# Altium PCB PCB1.PcbDoc
Units mil, origin at the board's own origin, x right, y up, seen from the top; angles counter-clockwise.
Board outline 3105 x 1655 mil, 2 copper layers (Top Layer, Bottom Layer); 35 components, 32 nets, 114 pads, 0 vias.
Unrouted connection lines stored in the file: 64.
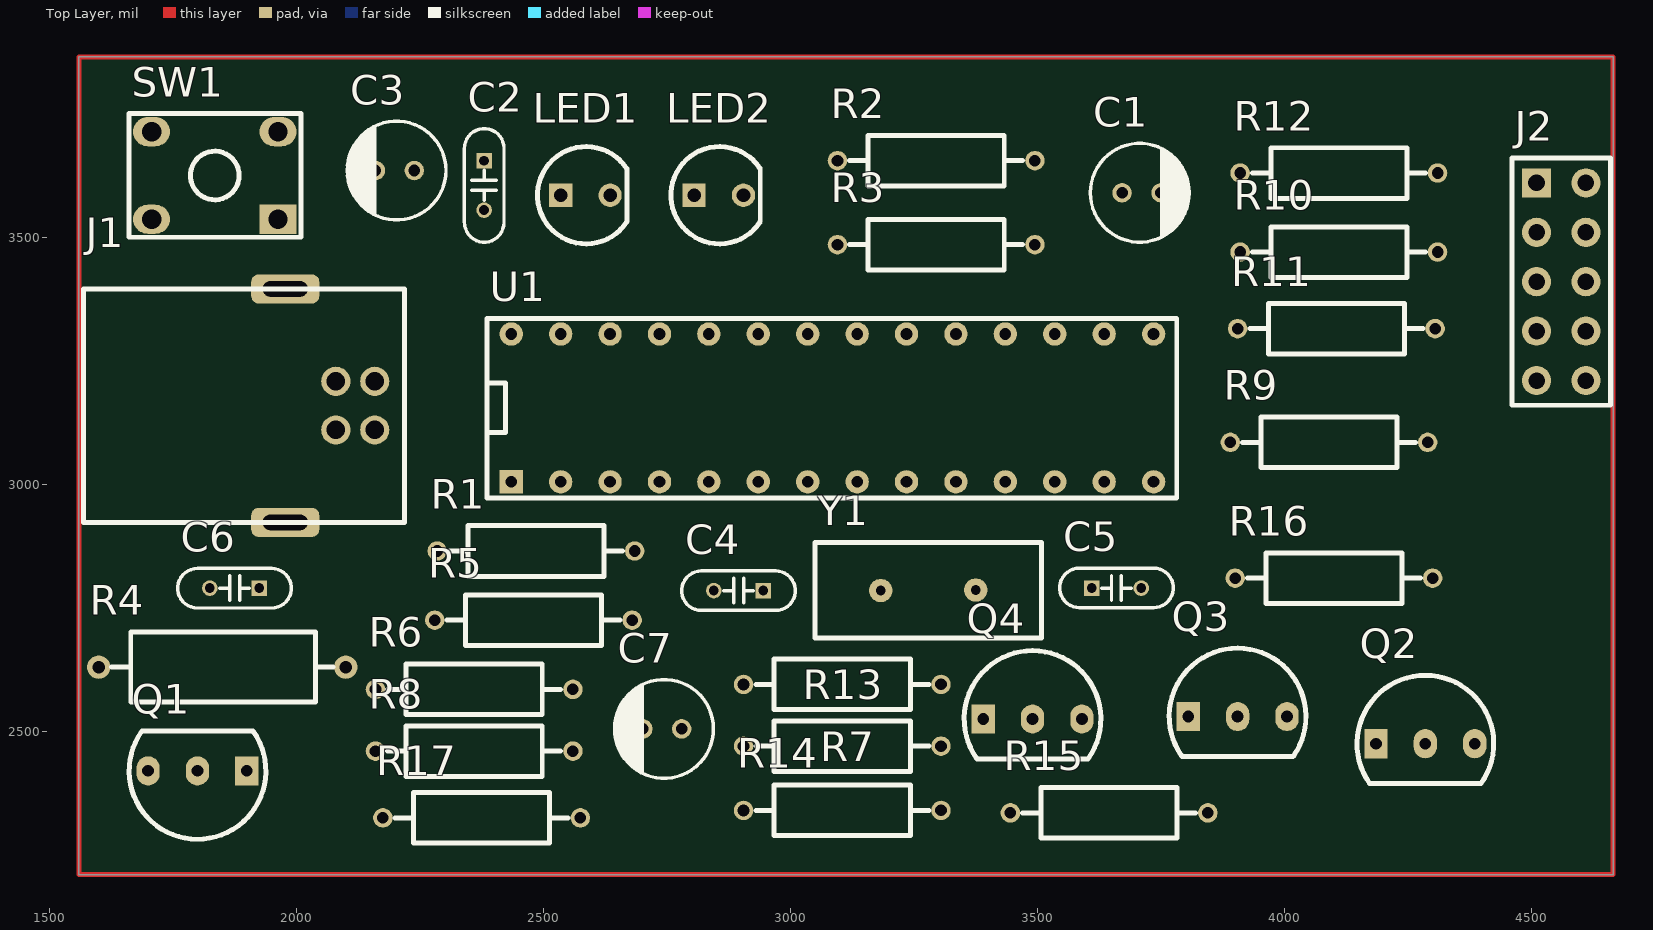
[diagram p0: Top Layer view]
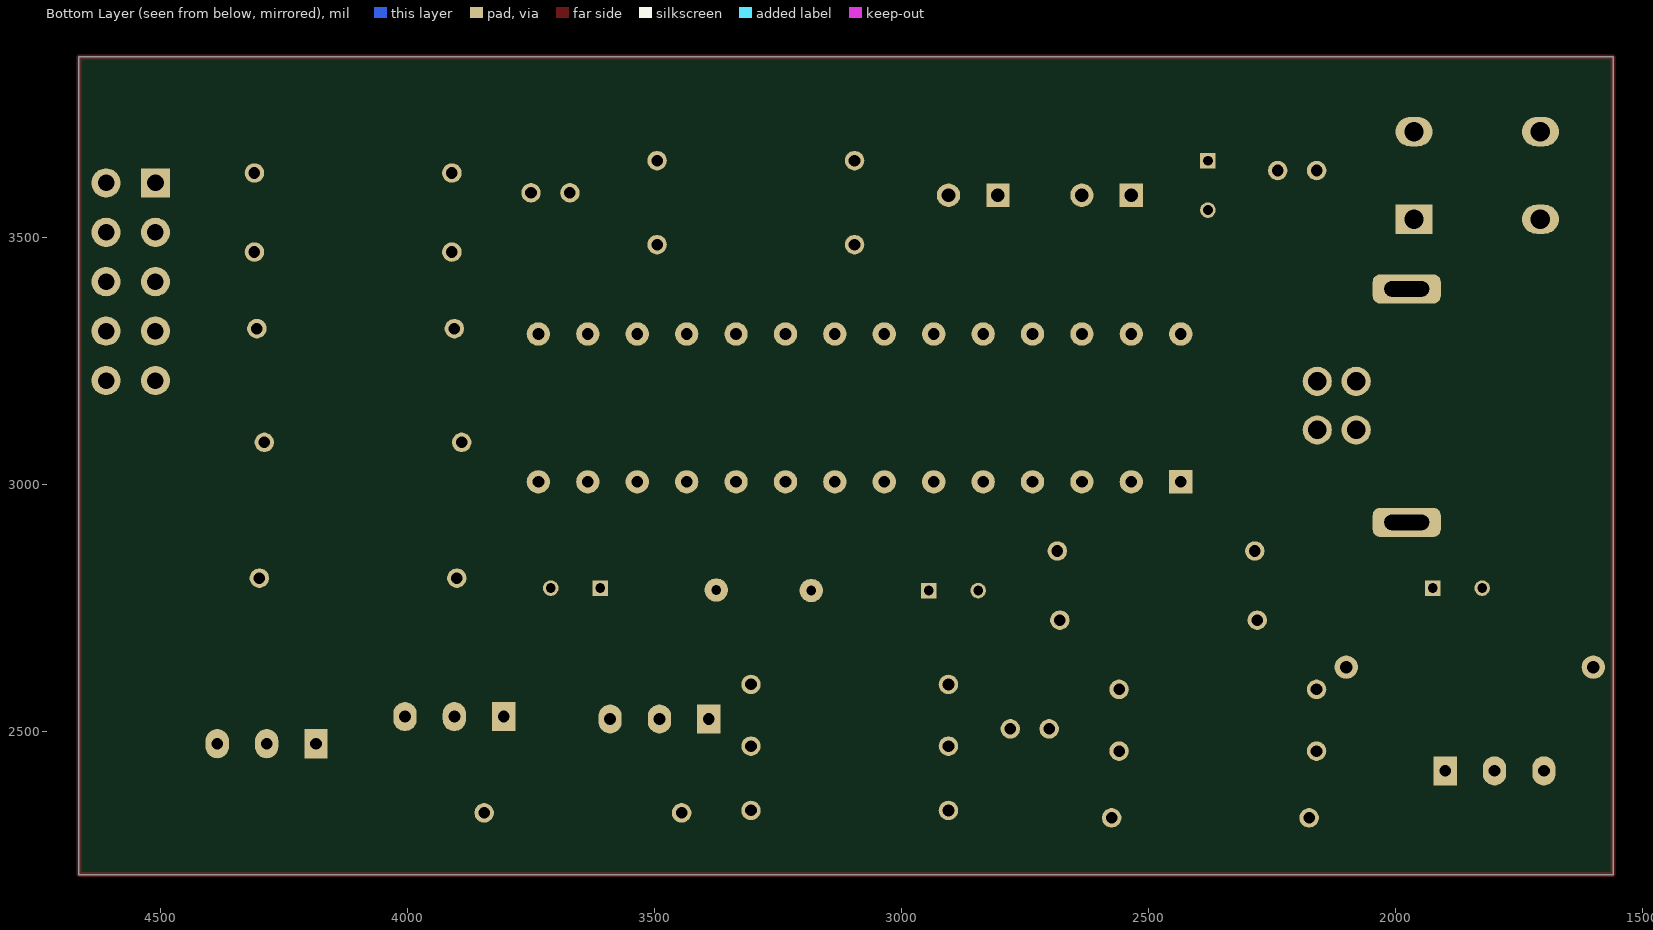
[diagram p1: Bottom Layer view, seen from below]

## Layer stack, top to bottom
Top Solder: solder mask 0.4, Solder Resist, Dk 3.5
Top Layer: signal copper 1.4
Dielectric 1: dielectric 12.6, FR-4, Dk 4.8
Bottom Layer: signal copper 1.4
Bottom Solder: solder mask 0.4, Solder Resist, Dk 3.5

## Board outline
1560,2210 1560,3865 4665,3865 4665,2210

## Design rules (kind name [scope] priority, off if disabled: settings)
Clearance [All] p1: gap=10 ignorepadtopadclearanceinfootprint=FALSE except(0: Arc-Hole Track-Hole SMDPad-Hole THPad-Hole Via-Hole Fill-Hole Poly-Hole Region-Hole Text-Hole)
PolygonConnect [All] p1: connectstyle=Relief reliefconductorwidth=10 reliefentries=4 polygonreliefangle="90 Angle" airgapwidth=10
RoutingVias [All] p1: holewidth=28 width=50 viastyle="Through Hole" minholewidth=28 minwidth=50 maxholewidth=28 maxwidth=50
SolderMaskExpansion [All] p1: expansion=4
Width [All] p1: maxlimit=10 minlimit=10 preferedwidth=10
30 further rules are at their usual default settings.

## Components (designator, comment, footprint, x,y, rotation, side; value= is the part's Value field where it differs from the comment)
C1 "10uF" CAP_RAD_4mm 3710.63,3590 r0 top
C2 "100pF" CAP_DISC_PITCH_2.54MM 2380,3605 r270 top
C3 "47uF" CAP_RAD_4mm 2199.37,3635 r180 top
C4 "100pF" CAP_DISC_PITCH_2.54MM 2895,2785 r180 top
C5 "100pF" CAP_DISC_PITCH_2.54MM 3660,2790 r0 top
C6 "100pF" CAP_DISC_PITCH_2.54MM 1875,2790 r180 top
C7 "47uF" CAP_RAD_4mm 2740.63,2505 r180 top
J1 "USB B Type" USB-B-TYPE 2119.37,3159.21 r0 top
J2 "Header 5x2 TH Pitch 2.54mm" "Header 5x2 TH Pitch 2.54mm" 4560,3410 r0 top
LED1 "LED 5mm" LED_5MM 2585,3585 r0 top
LED2 "LED 5mm" LED_5MM 2855,3585 r0 top
Q1 "2SC1815" TO-92 1800,2420 r180 top
Q2 "2SA1015" TO-92 4285,2475 r0 top
Q3 "2SC1815" TO-92 3905,2530 r0 top
Q4 "2SC1815" TO-92 3490,2525 r0 top
R1 "4K7" RES-0.25W-H-MF 2485,2865 r180 top
R2 "330" RES-0.25W-H-MF 3295,3655 r0 top
R3 "330" RES-0.25W-H-MF 3295,3485 r0 top
R4 "680uH" RES-0.5W-HH-MF 1850,2630 r180 top
R5 "1N4148" RES-0.25W-H-MF 2480,2725 r180 top
R6 "1N4148" RES-0.25W-H-MF 2360,2585 r0 top
R7 "4K7" RES-0.25W-H-MF 3105,2470 r180 top
R8 "100K" RES-0.25W-H-MF 2360,2460 r0 top
R9 "1N4148" RES-0.25W-H-MF 4090,3085 r180 top
R10 "100" RES-0.25W-H-MF 4110,3470 r180 top
R11 "100" RES-0.25W-H-MF 4105,3315 r0 top
R12 "100" RES-0.25W-H-MF 4110,3630 r0 top
R13 "2K7" RES-0.25W-H-MF 3105,2595 r0 top
R14 "10K" RES-0.25W-H-MF 3105,2340 r180 top
R15 "100" RES-0.25W-H-MF 3645,2335 r0 top
R16 "10K" RES-0.25W-H-MF 4100,2810 r180 top
R17 "10K" RES-0.25W-H-MF 2375,2325 r180 top
SW1 "Button Hole" BUTTON_HOLE_5.0mm 1835,3625 r270 top
U1 "PIC18F2550" DIP28_M04 3085,3154.61 r90 top
Y1 "8MHz" HC-49S 3375,2785 r180 top

## Footprints (in the part's own frame and the unit in brackets; to place one, negate y for a bottom-side part, rotate by r counter-clockwise, add the part's x,y. Pads: shape width x height; smd on the part's side, far side on the other; paste and mask are expansions set on the pad)
BUTTON_HOLE_5.0mm [mm]
  rect 1.5x1.9 hole 1: 1(2.25,3.25)
  oval 1.5x1.9 hole 1: 2(2.25,-3.25) 3(-2.25,3.25) 4(-2.25,-3.25)
  silkscreen extent -3.18,-4.4 3.18,4.43, body extent -3,-3.86 3,3.86, height 5
CAP_DISC_PITCH_2.54MM [mm]
  rect 0.8x0.8 hole 0.5: 1(-1.27,0)
  round 0.8 hole 0.5: 2(1.27,0)
  silkscreen extent -2.92,-1.01 2.92,1.02, body extent -2.92,-0.85 2.92,0.85, height 5.97
CAP_RAD_4mm [mm]
  round 1 hole 0.6: 1(-1,0) 2(1,0)
  silkscreen extent -2.63,-2.54 2.51,2.54, body extent -2.53,-2.53 2.52,2.53, height 7.29
DIP28_M04 [mm]
  rect 1.2x1.2 hole 0.6: 1(-3.8,16.51)
  round 1.2 hole 0.6: 2(-3.8,13.97) 3(-3.8,11.43) 4(-3.8,8.89) 5(-3.8,6.35) 6(-3.8,3.81) 7(-3.8,1.27) 8(-3.8,-1.27) 9(-3.8,-3.81) 10(-3.8,-6.35) 11(-3.8,-8.89) 12(-3.8,-11.43) 13(-3.8,-13.97) 14(-3.8,-16.51) 15(3.8,-16.51) 16(3.8,-13.97) 17(3.8,-11.43) 18(3.8,-8.89) 19(3.8,-6.35) 20(3.8,-3.81) 21(3.8,-1.27) 22(3.8,1.27) 23(3.8,3.81) 24(3.8,6.35) 25(3.8,8.89) 26(3.8,11.43) 27(3.8,13.97) 28(3.8,16.51)
  silkscreen extent -4.63,-17.7 4.6,17.75, body extent -3.9,-17.7 3.98,17.7, height 5.2
HC-49S [mm]
  round 1.2 hole 0.5: 1(0,-0.025) 2(4.88,0)
  silkscreen extent -3.37,-2.47 8.25,2.45, body extent -3.24,-2.33 8.11,2.32, height 3.5
"Header 5x2 TH Pitch 2.54mm" [mm]
  rect 1.5x1.5 hole 0.85: 1(-1.27,5.08)
  round 1.5 hole 0.85: 2(1.27,5.08) 3(-1.27,2.54) 4(1.27,2.54) 5(-1.27,0) 6(1.27,0) 7(-1.27,-2.54) 8(1.27,-2.54) 9(-1.27,-5.08) 10(1.27,-5.08)
  silkscreen extent -2.54,-6.35 2.54,6.35, body extent -2.54,-6.35 2.54,6.35, height 8.89
LED_5MM [mm]
  rect 1.2x1.2 hole 0.7: 1(-1.27,0)
  round 1.2 hole 0.7: 2(1.27,0)
  silkscreen extent -2.46,-2.5 2.13,2.5, body extent -2.95,-2.95 2.5,2.95, height 8.6
RES-0.5W-HH-MF [mm]
  round 1.2 hole 0.65: 1(-6.35,0) 2(6.35,0)
  silkscreen extent -5.7,-1.8 5.7,1.8, body extent -6.62,-1.8 6.63,1.8, height 3.9
RES-0.25W-H-MF [mm]
  round 1 hole 0.6: 1(-5.075,0) 2(5.075,0)
  silkscreen extent -4.45,-1.3 4.45,1.3, body extent -5.35,-1.3 5.36,1.3, height 2.69
TO-92 [mm]
  rect 1.2x1.5 hole 0.6: 1(-2.54,0)
  oval 1.2x1.5 hole 0.6: 2(0,0) 3(2.54,0)
  silkscreen extent -3.51,-2.05 3.51,3.52, body extent -2.77,-1.21 2.77,2.35, height 7.58
USB-B-TYPE [mm]
  round 1.5 hole 0.95: 1(1,-1.25) 2(1,1.25) 3(-1,1.25) 4(-1,-1.25)
  rrect50% 3.5x1.5 hole 0.8 slot 2.3 at 0 deg: S1(-3.6,6) S2(-3.6,-6)
  silkscreen extent -13.98,-6 2.52,6, body extent -13.97,-7.42 2.53,7.37, height 11

## Part data
C1 C3 C7: library part Capacitor(Radian)
C2 C4 C5 C6: library part Capacitors(Disc)
Q1 Q3 Q4: library part "2SC1815 (TO-92)"
Q2: library part "2SA1015 (TO-92)"
R1 R2 R3 R4 R5 R6 R7 R8 R9 R10 R11 R12 R13 R14 R15 R16 R17: library part "Resistors THD"
Y1: library part Crystal

## Nets (pads, with @x,y where several pads share a name; then routed paths per layer and width w, separated by ;. In a path a pad name is that pad's centre, name@x,y a point inside that pad or via, vN(x,y) a via of type N, cw(c..) or ccw(c..) an arc to the next point about the centre after c; other vN are vias at no path point)
BUSY: R3.2 U1.11
GND: C1.2 C2.1 C3.2 C4.2 C5.2 C6.1 C7.2 J1.4 J2.6 LED1.2 LED2.2 Q1.1 Q3.1 Q4.1 R13.1 SW1.4 U1.8 U1.19
ICSP_AUX: R10.2 U1.6
ICSP_PGC: R11.1 U1.5
ICSP_PGD: R12.1 U1.4
ICSP_VDD: J2.8 R9.1
ICSP_VPP: J2.10 Q2.2 R15.2
MCLR: R17.2 U1.7
NetC3_1: C3.1 U1.14
NetC7_1: C7.1 Q2.1 R5.1 R7.2 R8.2
NetJ1_2: J1.2 U1.15
NetJ1_3: J1.3 U1.16
NetJ2_1: J2.1 R10.1
NetJ2_2: J2.2 R11.2
NetJ2_4: J2.4 R12.2
NetLED1_1: LED1.1 R2.1
NetLED2_1: LED2.1 R3.1
NetQ1_2: Q1.2 R4.1 R5.2
NetQ1_3: Q1.3 R6.1
NetQ2_3: Q2.3 R8.1 R14.2
NetQ3_2: Q3.2 R14.1
NetQ3_3: Q3.3 R16.1
NetQ4_2: Q4.2 R15.1
NetQ4_3: Q4.3 R17.1
NetR1_1: R1.1 U1.3
OSC1: C4.1 U1.9 Y1.2
OSC2: C5.1 U1.10 Y1.1
START_BT: SW1.2 U1.26
VCC: C1.1 C2.2 C6.2 J1.1 R1.2 R2.2 R4.2 R9.2 U1.20
VPP_FD: R7.1 R13.2 U1.2
VPP_ON: R16.2 U1.23
VPP_PUMP: R6.2 U1.12
pads on no net: J1.S1 J1.S2 J2.3 J2.5 J2.7 J2.9 SW1.1 SW1.3 U1.1 U1.13 U1.17 U1.18 U1.21 U1.22 U1.24 U1.25 U1.27 U1.28
copper on no net: | length 9520
  Top Layer w10: 1560,2210 3890,2210 4665,2210 4665,2320 4665,3865 1560,3865 1560,2210